# Altium PCB PCB1.PcbDoc
Units mm, origin at the board's own origin, x right, y up, seen from the top; angles counter-clockwise.
Board outline 33.4 x 22.61 mm, 2 copper layers (Top Layer, Bottom Layer); 12 components, 7 nets, 36 pads, 6 vias.
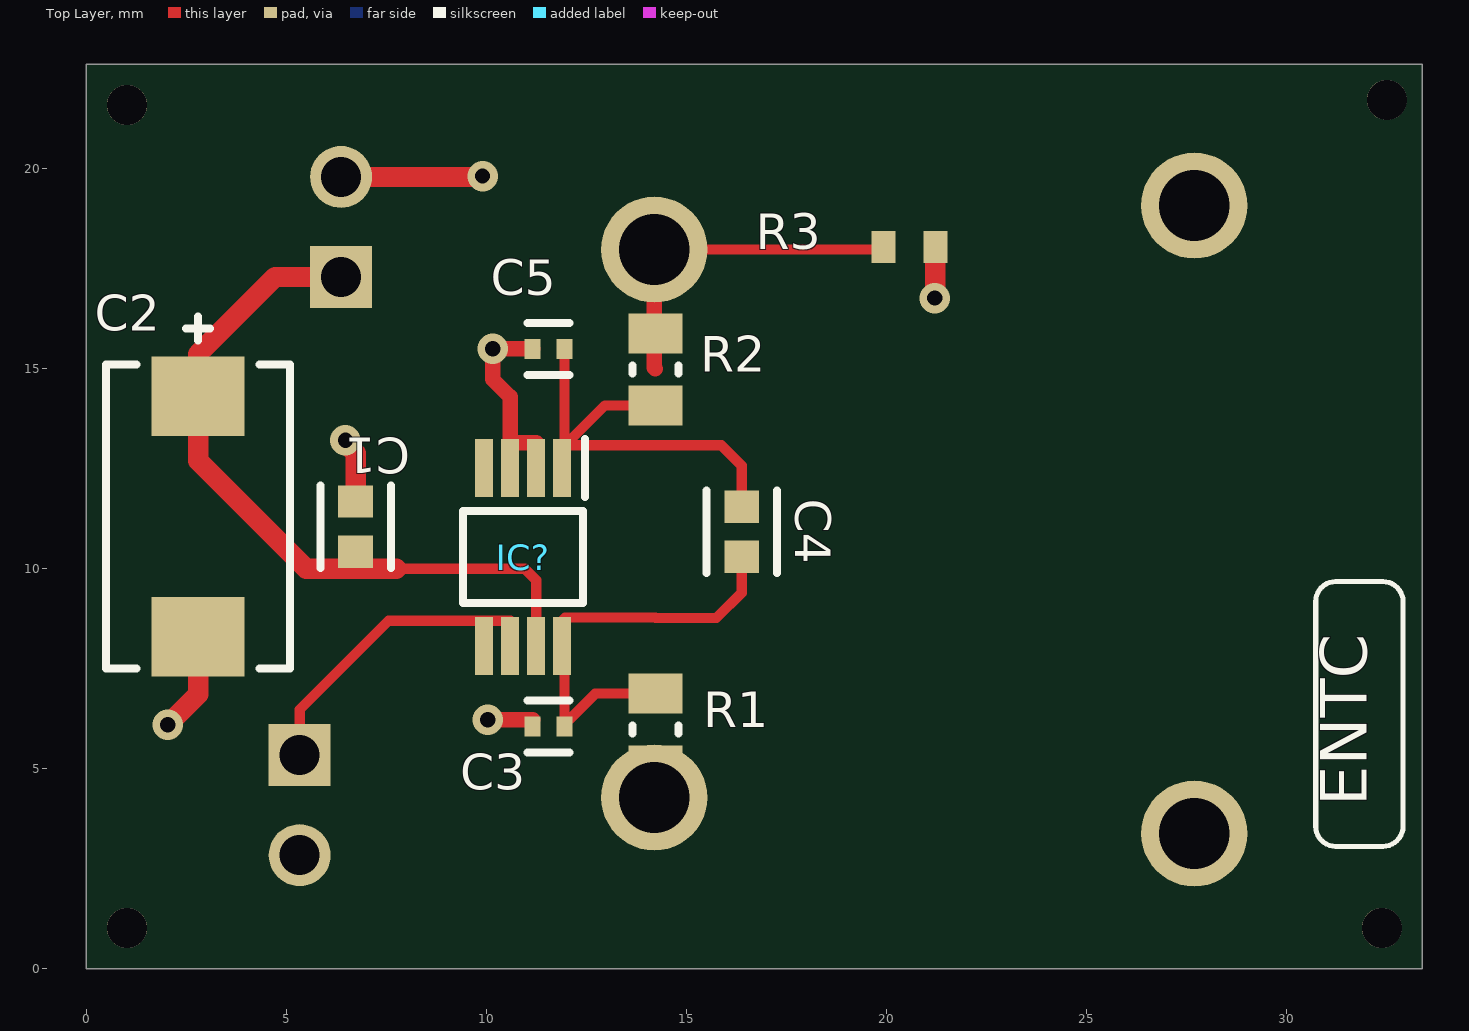
[diagram p0: Top Layer view]
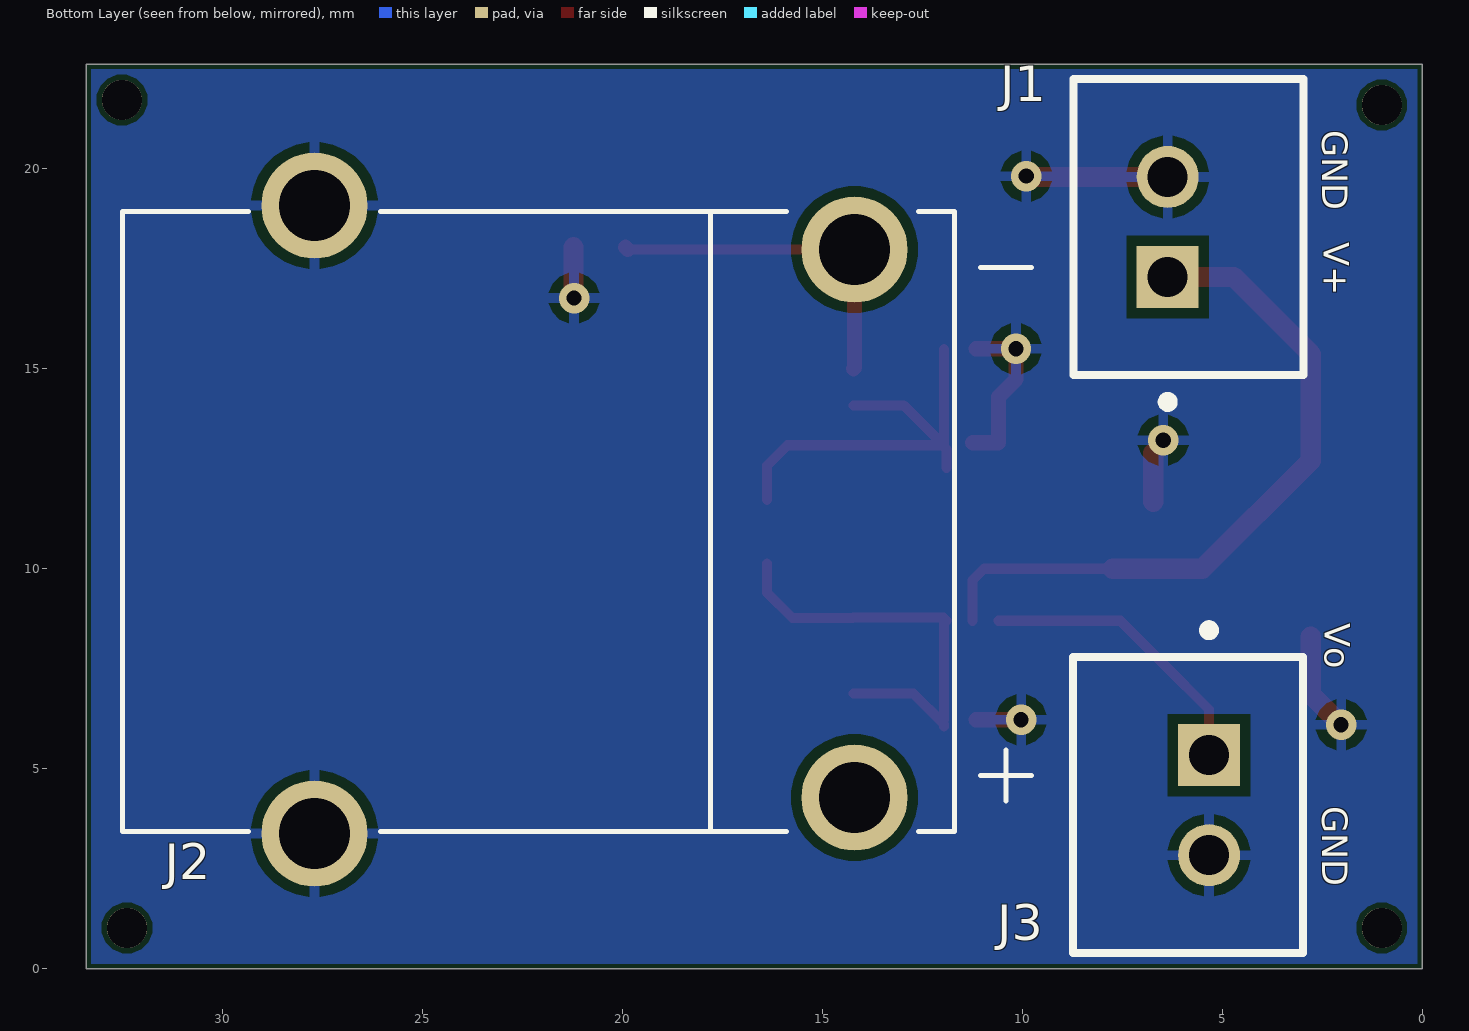
[diagram p1: Bottom Layer view, seen from below]
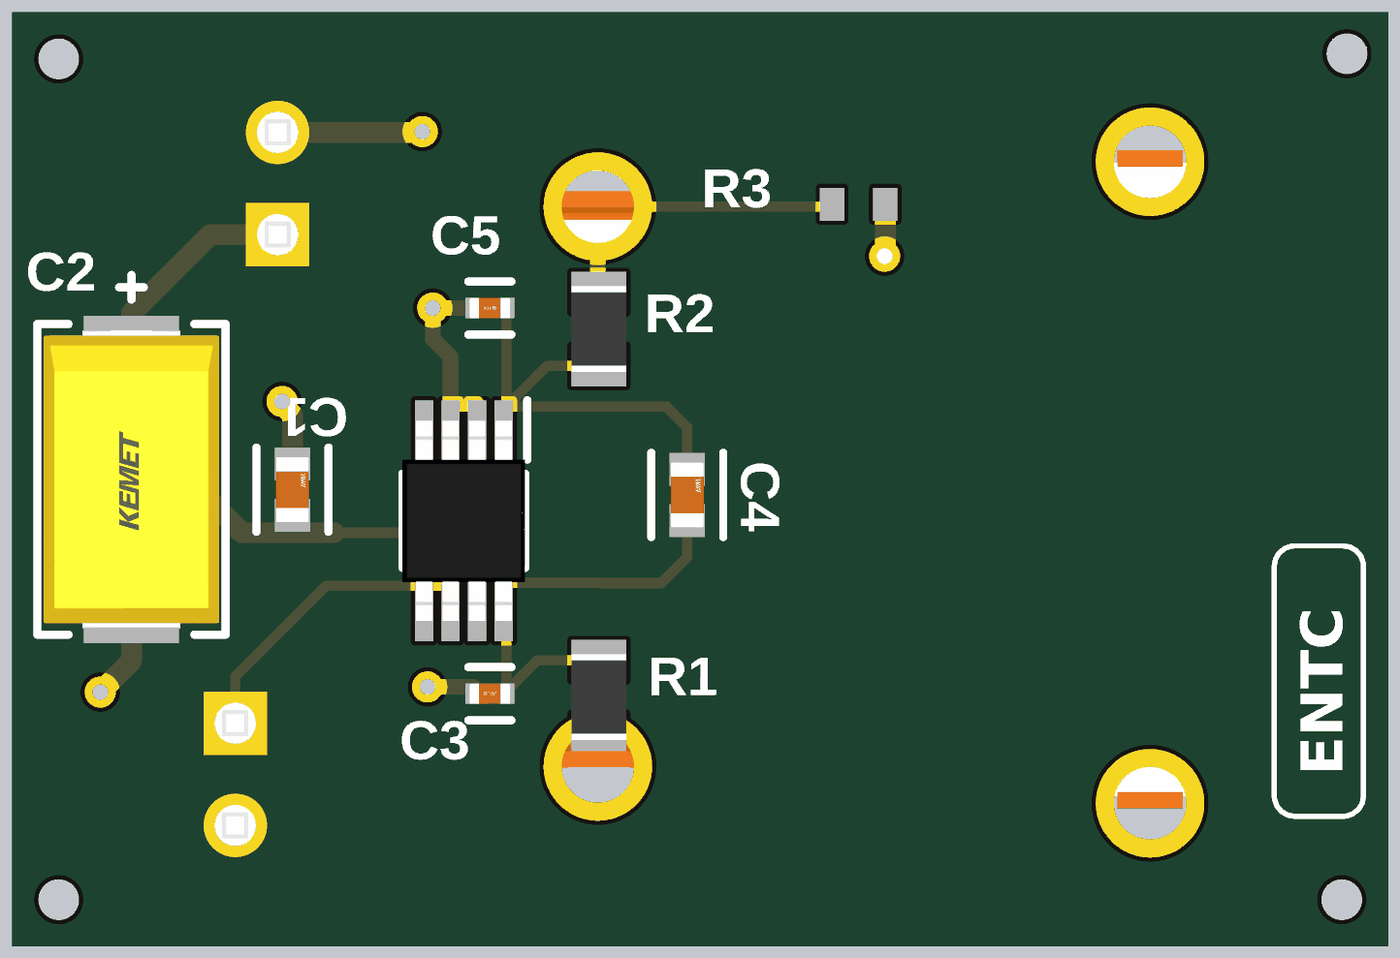
[diagram p2: 3D render of the assembled board from above, using the file's embedded part models]
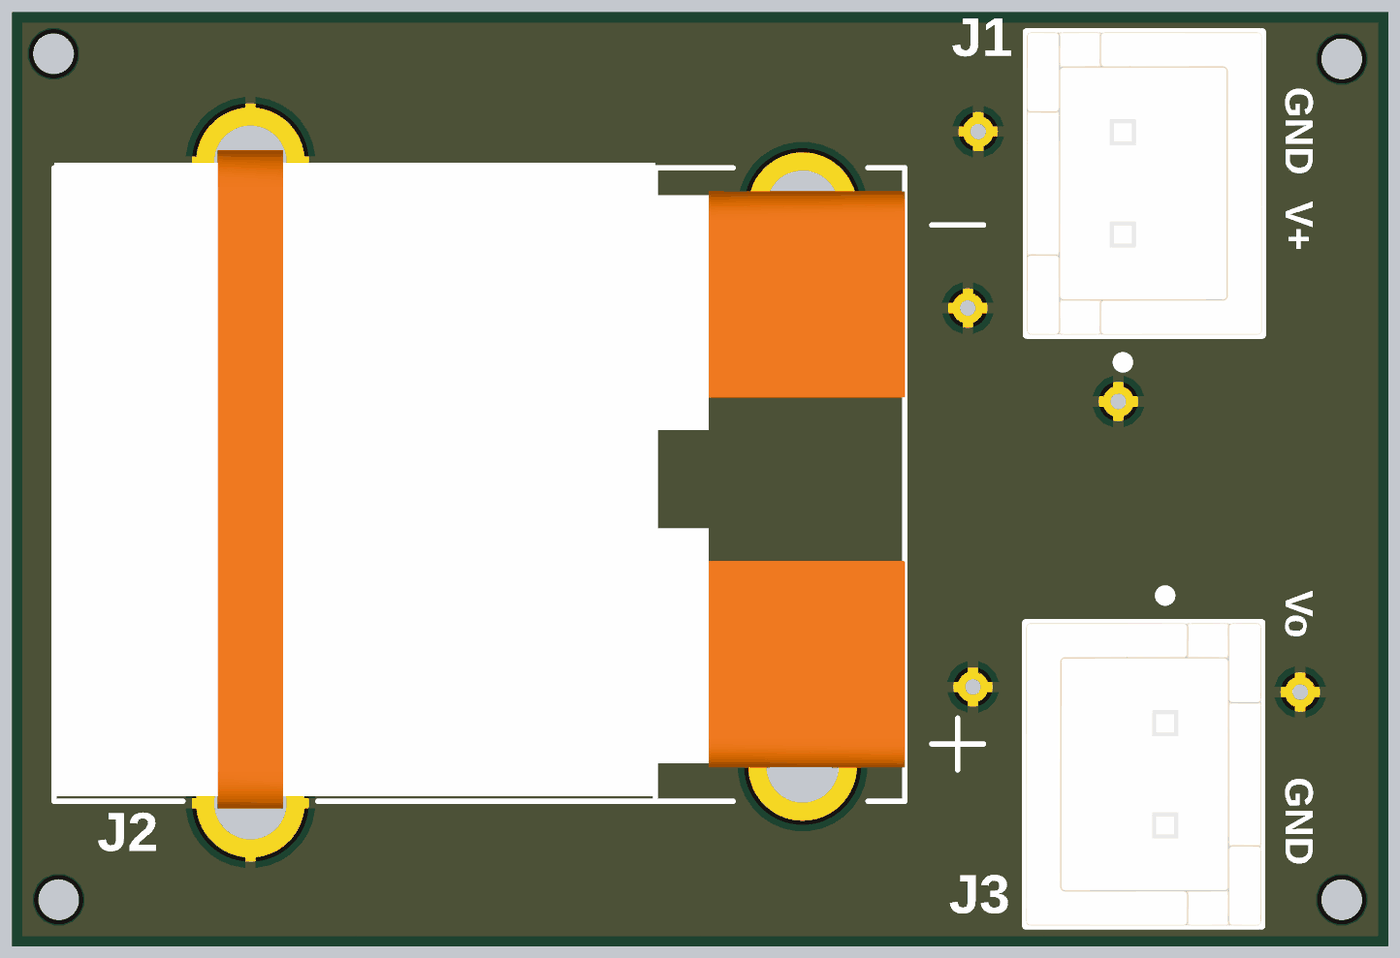
[diagram p3: 3D render of the assembled board from below, using the file's embedded part models]

## Layer stack, top to bottom
Top Solder: solder mask 0.0102, Solder Resist, Dk 3.5
Top Layer: signal copper 0.0356
Dielectric 1: dielectric 0.32, FR-4, Dk 4.8
Bottom Layer: signal copper 0.0356
Bottom Solder: solder mask 0.0102, Solder Resist, Dk 3.5

## Board outline
0,0 0,22.606 33.401,22.606 33.401,0

## Design rules (kind name [scope] priority, off if disabled: settings)
Clearance [All] p1: gap=0.254 ignorepadtopadclearanceinfootprint=FALSE except(0: Arc-Text Track-Text SMDPad-Text THPad-Text Via-Text Fill-Text Poly-Text Region-Text Text-Text Text-Hole; 0.127: Arc-Arc Arc-Track Arc-SMDPad Track-Track Track-SMDPad SMDPad-SMDPad SMDPad-Hole THPad-Hole Via-Hole Fill-Hole Poly-Hole Region-Hole; 0.381: Arc-THPad Arc-Hole Track-THPad Track-Hole)
DiffPairsRouting [InDifferentialPair('MID')] p1: maxlimit=0.254 minlimit=0.254 mostfreqgap=0.254 toplayer_minwidth=0.381 toplayer_maxwidth=0.381 toplayer_prefwidth=0.381 bottomlayer_minwidth=0.381 bottomlayer_maxwidth=0.381 bottomlayer_prefwidth=0.381 maxuncoupledlength=12.7
PolygonConnect [All] p1: connectstyle=Relief reliefconductorwidth=0.254 reliefentries=4 polygonreliefangle="90 Angle" airgapwidth=0.254
RoutingVias [All] p1: holewidth=0.381 width=0.762 viastyle="Through Hole" minholewidth=0.381 minwidth=0.762 maxholewidth=0.381 maxwidth=0.762
SilkToSilkClearance [All] p1: silktosilkclearance=0.127
SilkToSolderMaskClearance [IsPad] p1: minsilkscreentomaskgap=0.127 clearancetoexposedcopper=TRUE
SolderMaskExpansion [All] p1: expansion=0.102 istentingtop=FALSE
SupplyNets "Schematic Supply Nets_1" [InNet('VCC')] p1: voltage=0.000
SupplyNets "Schematic Supply Nets" [InNet('GND')] p2: voltage=0.000
Width [All] p1: maxlimit=0.508 minlimit=0.127 preferedwidth=0.254
27 further rules are at their usual default settings.

## Classes and differential pairs
differential pair IN: +IN_P -IN_N

## Components (designator, comment, footprint, x,y, rotation, side; value= is the part's Value field where it differs from the comment)
C1 "10nF 25V" FP-0603-L_1_6_0_15-W_0_81-IPC_C 6.731,11.049 r90 top
C2 "10uF 25V" FP-T491D-MFG 2.794,11.303 r90 top
C3 "100nF 16V" FP-C1005-050-0_05-MFG 11.557,6.058 r0 top
C4 "10nF 25V" FP-0603-L_1_6_0_15-W_0_81-IPC_C 16.383,10.922 r90 top
C5 "100nF 16V" FP-C1005-050-0_05-MFG 11.557,15.494 r180 top
IC? "AD8495ARMZ" SOP65P490X110-8N 10.922,10.287 r270 top
J1 "B2B-XH-A(LF)(SN)" FP-B2B-XH-A_LF_SN-MFG 5.842,18.542 r90 bottom
J2 "PCC-SMP-K-5" OMEGA_PCC-SMP-K-5 22.098,11.176 r0 bottom
J3 "B2B-XH-A(LF)(SN)" FP-B2B-XH-A_LF_SN-MFG 5.859,4.084 r270 bottom
R1 "10k 0.1W" RESC2013X60X35NL10T20 14.224,5.975 r90 top
R2 "10k 0.1W" RESC2013X60X35NL10T20 14.224,14.98 r270 top
R3 "1M  0.1W" RESC1608X55X25LL10T15 20.574,18.034 r180 top

## Footprints (in the part's own frame and the unit in brackets; to place one, negate y for a bottom-side part, rotate by r counter-clockwise, add the part's x,y. Pads: shape width x height; smd on the part's side, far side on the other; paste and mask are expansions set on the pad)
FP-0603-L_1_6_0_15-W_0_81-IPC_C [mm]
  rect 0.807x0.868 smd paste+0 mask+0: 1(-0.626,0) 2(0.626,0)
  silkscreen extent -1.03,-0.88 1.03,0.88, body extent -1.13,-0.58 1.13,0.58, height 0.25
FP-B2B-XH-A_LF_SN-MFG [mm]
  rect 1.55x1.55 hole 1 paste-2539.97 mask+0: 1(-1.25,0.525)
  round 1.55 hole 1 paste-2539.97 mask+0: 2(1.25,0.525)
  silkscreen extent -4.5,-2.88 3.7,2.88, body extent -3.7,-2.88 3.7,2.88, height 7
FP-C1005-050-0_05-MFG [mm]
  rect 0.4x0.5 smd paste+0 mask+0: 1(-0.4,0) 2(0.4,0)
  silkscreen extent -0.53,-0.65 0.53,0.65, body extent -0.7,-0.38 0.7,0.38, height 0.25
FP-T491D-MFG [mm]
  rect 1.99x2.33 smd paste+0 mask+0: 1(-3.01,0) 2(3.01,0)
  silkscreen extent -3.8,-2.3 5,2.3, body extent -4.13,-2.42 4.13,2.42, height 0.25
OMEGA_PCC-SMP-K-5 [mm]
  round 2.655 hole 1.77: N(-7.9,-6.8) P(-7.9,6.9) S1(5.6,7.8) S2(5.6,-7.9)
  silkscreen extent -12.33,-7.75 10.4,7.75, body extent -10.4,-8.18 10.4,7.92, height 6.6
RESC1608X55X25LL10T15 [mm] "Chip Resistor, 2-Leads, Body 1.70x0.90mm, IPC High Density"
  rect 0.6x0.8 smd: 1(-0.65,0) 2(0.65,0)
  body extent -0.85,-0.45 0.85,0.45, height 0.55
RESC2013X60X35NL10T20 [mm] "Chip Resistor, 2-Leads, Body 2.1x1.35mm, IPC Medium Density"
  rect 1x1.35 smd: 1(-0.9,0) 2(0.9,0)
  silkscreen extent -0.1,-0.58 0.1,0.58, body extent -1.05,-0.68 1.05,0.67, height 0.6
SOP65P490X110-8N [mm]
  rect 1.45x0.45 smd: 1(-2.225,0.975) 2(-2.225,0.325) 3(-2.225,-0.325) 4(-2.225,-0.975) 5(2.225,-0.975) 6(2.225,-0.325) 7(2.225,0.325) 8(2.225,0.975)
  silkscreen extent -2.95,-1.5 1.15,1.55, body extent -2.45,-1.5 2.45,1.5, height 1

## Part data
C1 C4: library part CMP-2006-04155-2, "General Purpose Ceramic Capacitor, 0603, 10nF, 10%, X7R, 15%, 25V", Capacitance=10nF, Case Code (Imperial)=0603, Case Code (Metric)=1608, Dielectric=X7R, Max Operating Temperature=125°C, Min Operating Temperature=-55°C, Package Quantity=1, Tolerance=10%, Voltage=50V, Voltage Rating=25V, Case/Package=0603, Construction=Flat, Contact Plating=Tin, Depth=0.81mm, Lead Free="Lead Free", Length=1.6mm, Mount="Surface Mount", Number of Pins=2, Packaging="Tape and Reel", Radiation Hardening=No, REACH SVHC="No SVHC", RoHS Compliant=Yes, Series=-, Termination=SMD/SMT, Thickness=0.035inch, Voltage Rating (DC)=25V, Width=0.032inch
C2: library part CMP-2000-07200-2, "CAP TANT 10UF 10% 25V 2917", Capacitance=10uF, Case Code (Imperial)=2917, Case Code (Metric)=7343, Dielectric Material=Tantalum, ESR (Equivalent Series Resistance)=1R, Leakage Current=2.5uA, Max Operating Temperature=125°C, Min Operating Temperature=-55°C, Package Quantity=1, Ripple Current=387mA, Tolerance=20%, Voltage=25V, Case/Package=2917, Depth=4.3mm, Dissipation Factor=6%, Features="General Purpose", Height=2.8mm, Height - Seated (Max)=0.122inch, Lead Free="Lead Free", Length=7.3mm, Life (Hours)=2000Hour, Mount="Surface Mount", Number of Pins=2, Packaging="Tape and Reel", Polarity=Polar, Radiation Hardening=No, REACH SVHC="No SVHC", Termination=SMD/SMT, Voltage Rating=25V, Voltage Rating (DC)=25V, Width=4.3mm
C3 C5: library part CMP-08246-004182-1, "Multilayer Ceramic Capacitors 100nF ±10% 16V X7R SMD 0402", Capacitance=100nF, Case Code (Imperial)=0402, Case Code (Metric)=1005, Dielectric=X7R, Dielectric Material=Ceramic, Max Operating Temperature=125°C, Min Operating Temperature=-55°C, Package Quantity=1, Tolerance=10%, Voltage=16V, Case/Package=0402, Construction=Flat, Depth=0.5mm, Height=0.5mm, Lead Free="Lead Free", Length=1mm, Mount="Surface Mount", Number of Pins=2, Packaging="Tape and Reel", Radiation Hardening=No, Resistor Type=Ceramic, RoHS Compliant=Yes, Series=C, Termination=SMD/SMT, Thickness=0.022inch, Voltage Rating=16V, Voltage Rating (DC)=16V, Weight=2.3E-05oz, Width=0.02inch
IC?: "Integrated Circuit", Manufacturer_Name="Analog Devices", Mouser Part Number=584-AD8495ARMZ, Arrow Part Number=AD8495ARMZ, Arrow Price/Stock=https://www.arrow.com/en/products/ad8495armz/analog-devices?region=europe, Datasheet Link=http://componentsearchengine.com/Datasheets/1/AD8495ARMZ.pdf, Height=1.1mm, Manufacturer_Part_Number=AD8495ARMZ, Mouser Price/Stock=https://www.mouser.co.uk/ProductDetail/Analog-Devices/AD8495ARMZ?qs=%2FtpEQrCGXCzFkbQFVK6T6w%3D%3D
J1 J3: library part CMP-2000-05888-3, "CONN HEADER VERT 2POS 2.5MM", Color=Natural, Contact Resistance=20mR, Current Rating=3A, Housing Color=White, Insulation Resistance=1GR, Max Operating Temperature=85°C, Max Voltage Rating (AC)=250V, Min Operating Temperature=-25°C, Connector Type="Male Pin", Contact Material=Brass, Contact Plating=Tin, Contact Type="Male Pin", Depth=5.75mm, Fastening Type=Detent, Housing Material=Polyamide, Lead Free="Lead Free", Lead Pitch=2.5mm, Length=7.4mm, Max Current Rating=3A, Max Voltage Rating (DC)=250V, Mount="Through Hole", Number of Contacts=2, Number of Positions=2, Number of Rows=1, Orientation=Straight, Packaging=Bulk, Pitch=2.5mm, REACH SVHC="No SVHC", Series=XH, Termination=Solder, Voltage Rating=250V, Voltage Rating (AC)=250V, Wire/Cable Gauge=22AWG
J2: "Thermocouple Conn, K Type, Rcpt, Pk 5", Package=None, Availability="No availability data", Check_prices=https://www.snapeda.com/parts/PCC-SMP-K-5/Omega%20Engineering/view-part/2886965/?ref=eda, MF="Omega Engineering", MP=PCC-SMP-K-5, Price=None, SnapEDA_Link=https://www.snapeda.com/parts/PCC-SMP-K-5/Omega%20Engineering/view-part/2886965/?ref=snap
R1 R2: library part CMP-1659-00013-4, "Chip Resistor, 10 KOhm, +/- 1%, 0.125 W, -55 to 155 degC, 0805 (2012 Metric), RoHS, Tape and Reel", Manufacturer=Yageo, Max Operating Temperature="155 degC", Min Operating Temperature="-55 degC", Package Quantity=5000, Voltage Rating="150 V", ComponentLink1Description="Manufacturer URL", ComponentLink1URL=http://www.yageo.com/, ComponentLink2Description=Datasheet, ComponentLink2URL=http://www.yageo.com/documents/recent/PYu-RC_Group_51_RoHS_L_04.pdf, DatasheetVersion="Rev. 4, 02/2016", Height="0.5 mm", Length="2 mm", Mount="Surface Mount", Mounting Technology="Surface Mount", PackageDescription="2-Pin Surface Mounted Device, Body 2 x 1.25 mm", PackageReference=0805, Packaging="Tape and Reel", Pins=2, REACH SVHC="No SVHC", RoHSCompliant=true
R3: library part CMP-1659-00056-1, "Chip Resistor, 1 MOhm, +/- 1%, 100 mW, -55 to 155 degC, 0603 (1608 Metric), RoHS, Tape and Reel", Capacitance="1 mF", Case\Package=Radial, Max Operating Temperature="85 degC", Min Operating Temperature="-40 degC", Package Quantity=200, Tolerance=20%, Voltage Rating="25 V", ComponentLink1Description="Manufacturer URL", ComponentLink1URL=http://www.yageo.com/, ComponentLink2Description=Datasheet, ComponentLink2URL=http://www.yageo.com/documents/recent/PYu-RC_Group_51_RoHS_L_04.pdf, DatasheetVersion="Rev. 4, 02/2016", Diameter="10 mm", Height="20 mm", Lead Pitch="5 mm", Length="20 mm", Mount="Through Hole", PackageDescription="2-Pin Surface Mount Device, Body 1.6 x 0.8 mm", PackageReference=0603, Packaging=Bulk, Radiation Hardening=No, REACH SVHC="No SVHC", RoHSCompliant=true, Voltage Rating (DC)="25 V", Width="0 inch"

## Free pads (board coordinates)
  round 1 hole 1 unplated: 3(1.016,1.016) 3(1.016,21.59) 3(32.385,1.016) 3(32.512,21.717)

## Via types
v1: diameter 0.762, hole 0.381, Top Layer to Bottom Layer, 6 vias

## Nets (pads, with @x,y where several pads share a name; then routed paths per layer and width w, separated by ;. In a path a pad name is that pad's centre, name@x,y a point inside that pad or via, vN(x,y) a via of type N, cw(c..) or ccw(c..) an arc to the next point about the centre after c; other vN are vias at no path point)
GND: C1.2 C2.1 C3.1 C5.2 IC?.2 IC?.3 J1.2 J2.S1 J2.S2 J3.2 R3.1 | length 14.3
  Top Layer w0.381: v1(10.033,6.223) C3.1@11.157,6.223 ; C5.2 v1(10.16,15.494) 10.16,14.732 10.597,14.295 10.597,13.147 IC?.2@11.247,13.147
  Top Layer w0.508: v1(2.032,6.096) 2.794,6.858 C2.1 ; J1.2 9.886,19.792 v1(9.906,19.812) ; v1(6.477,13.208) 6.477,13.139 6.731,12.885 C1.2 ; v1(21.209,16.764) 21.224,16.779 R3.1
IN_N: J2.N R2.1 R3.2 | length 8.7
  Top Layer w0.254: J2.N R3.2@19.866,17.976
  Top Layer w0.381: J2.N 14.198,15.023 14.224,14.997 ; R3.2@19.866,17.976 R3.2
IN_P: J2.P R1.1 | length 1.8
  Top Layer w0.381: R1.1@14.198,5.075 J2.P 14.198,4.795 R1.1@14.564,5.16
NetC3_2: C3.2 C4.1 IC?.8 R1.2 | length 10.6
  Top Layer w0.254: C3.2 11.957,6.108 12.724,6.875 R1.2 ; C3.2@11.957,6.223 11.957,8.637 11.897,8.697 11.974,8.774 14.224,8.774 14.235,8.763 15.748,8.763 16.383,9.398 C4.1@16.383,10.122
NetC4_2: C4.2 C5.1 IC?.1 R2.2 | length 11.1
  Top Layer w0.254: IC?.1 11.897,12.988 IC?.1@11.98,13.071 ; C5.1 IC?.1@11.957,13.094 ; IC?.1@11.975,13.077 IC?.1@11.957,13.094 ; IC?.1@11.995,13.086 15.87,13.086 16.383,12.573 C4.2@16.383,11.722 ; R2.2 12.965,14.08 11.979,13.094 IC?.1@11.957,13.094
OUT: IC?.5 IC?.6 J3.1 | length 7.3
  Top Layer w0.254: J3.1 5.334,6.477 6.477,7.62 7.554,8.697 9.947,8.697 IC?.6@10.597,8.697
VCC: C1.1 C2.2 IC?.7 J1.1 | length 17.7
  Top Layer w0.254: 7.747,9.995 10.96,9.995 11.247,9.708 IC?.7@11.247,8.697
  Top Layer w0.508: J1.1 4.719,17.292 2.794,15.367 C2.2 2.794,12.7 5.499,9.995 7.747,9.995
pads on no net: IC?.4

## Polygon pours and split planes (outlines as drawn)
GND on Bottom Layer "GND_L02_P000" (solid, pour order 0): 0.127,22.479 33.274,22.479 33.274,0.127 0.127,0.127

## Silkscreen, mask and mechanical layers (free items; w line width, h text height)
Top Overlay:
  lines w0.127: 30.734,3.556 ccw(c31.234,3.556) 31.234,3.056 32.417,3.056 ccw(c32.417,3.556) 32.917,3.556 32.917,9.176 ccw(c32.417,9.176) 32.417,9.676 31.234,9.676 ccw(c31.234,9.176) 30.734,9.176 30.734,3.556
  text "ENTC" at 32.393,4.056 h2 r90
Bottom Overlay:
  text "GND" at 2.714,20.955 h1.1 r90
  text "V+" at 2.682,18.161 h1.1 r90
  text "Vo" at 2.651,8.636 h1.1 r90
  text "GND" at 2.714,4.064 h1.1 r90
Mechanical 4:
  the board outline again, w0.254